# EAGLE board Qwiic_4_Pin_Fan_Controller-Panel (EAGLE 9.5.2), part 1 of 4
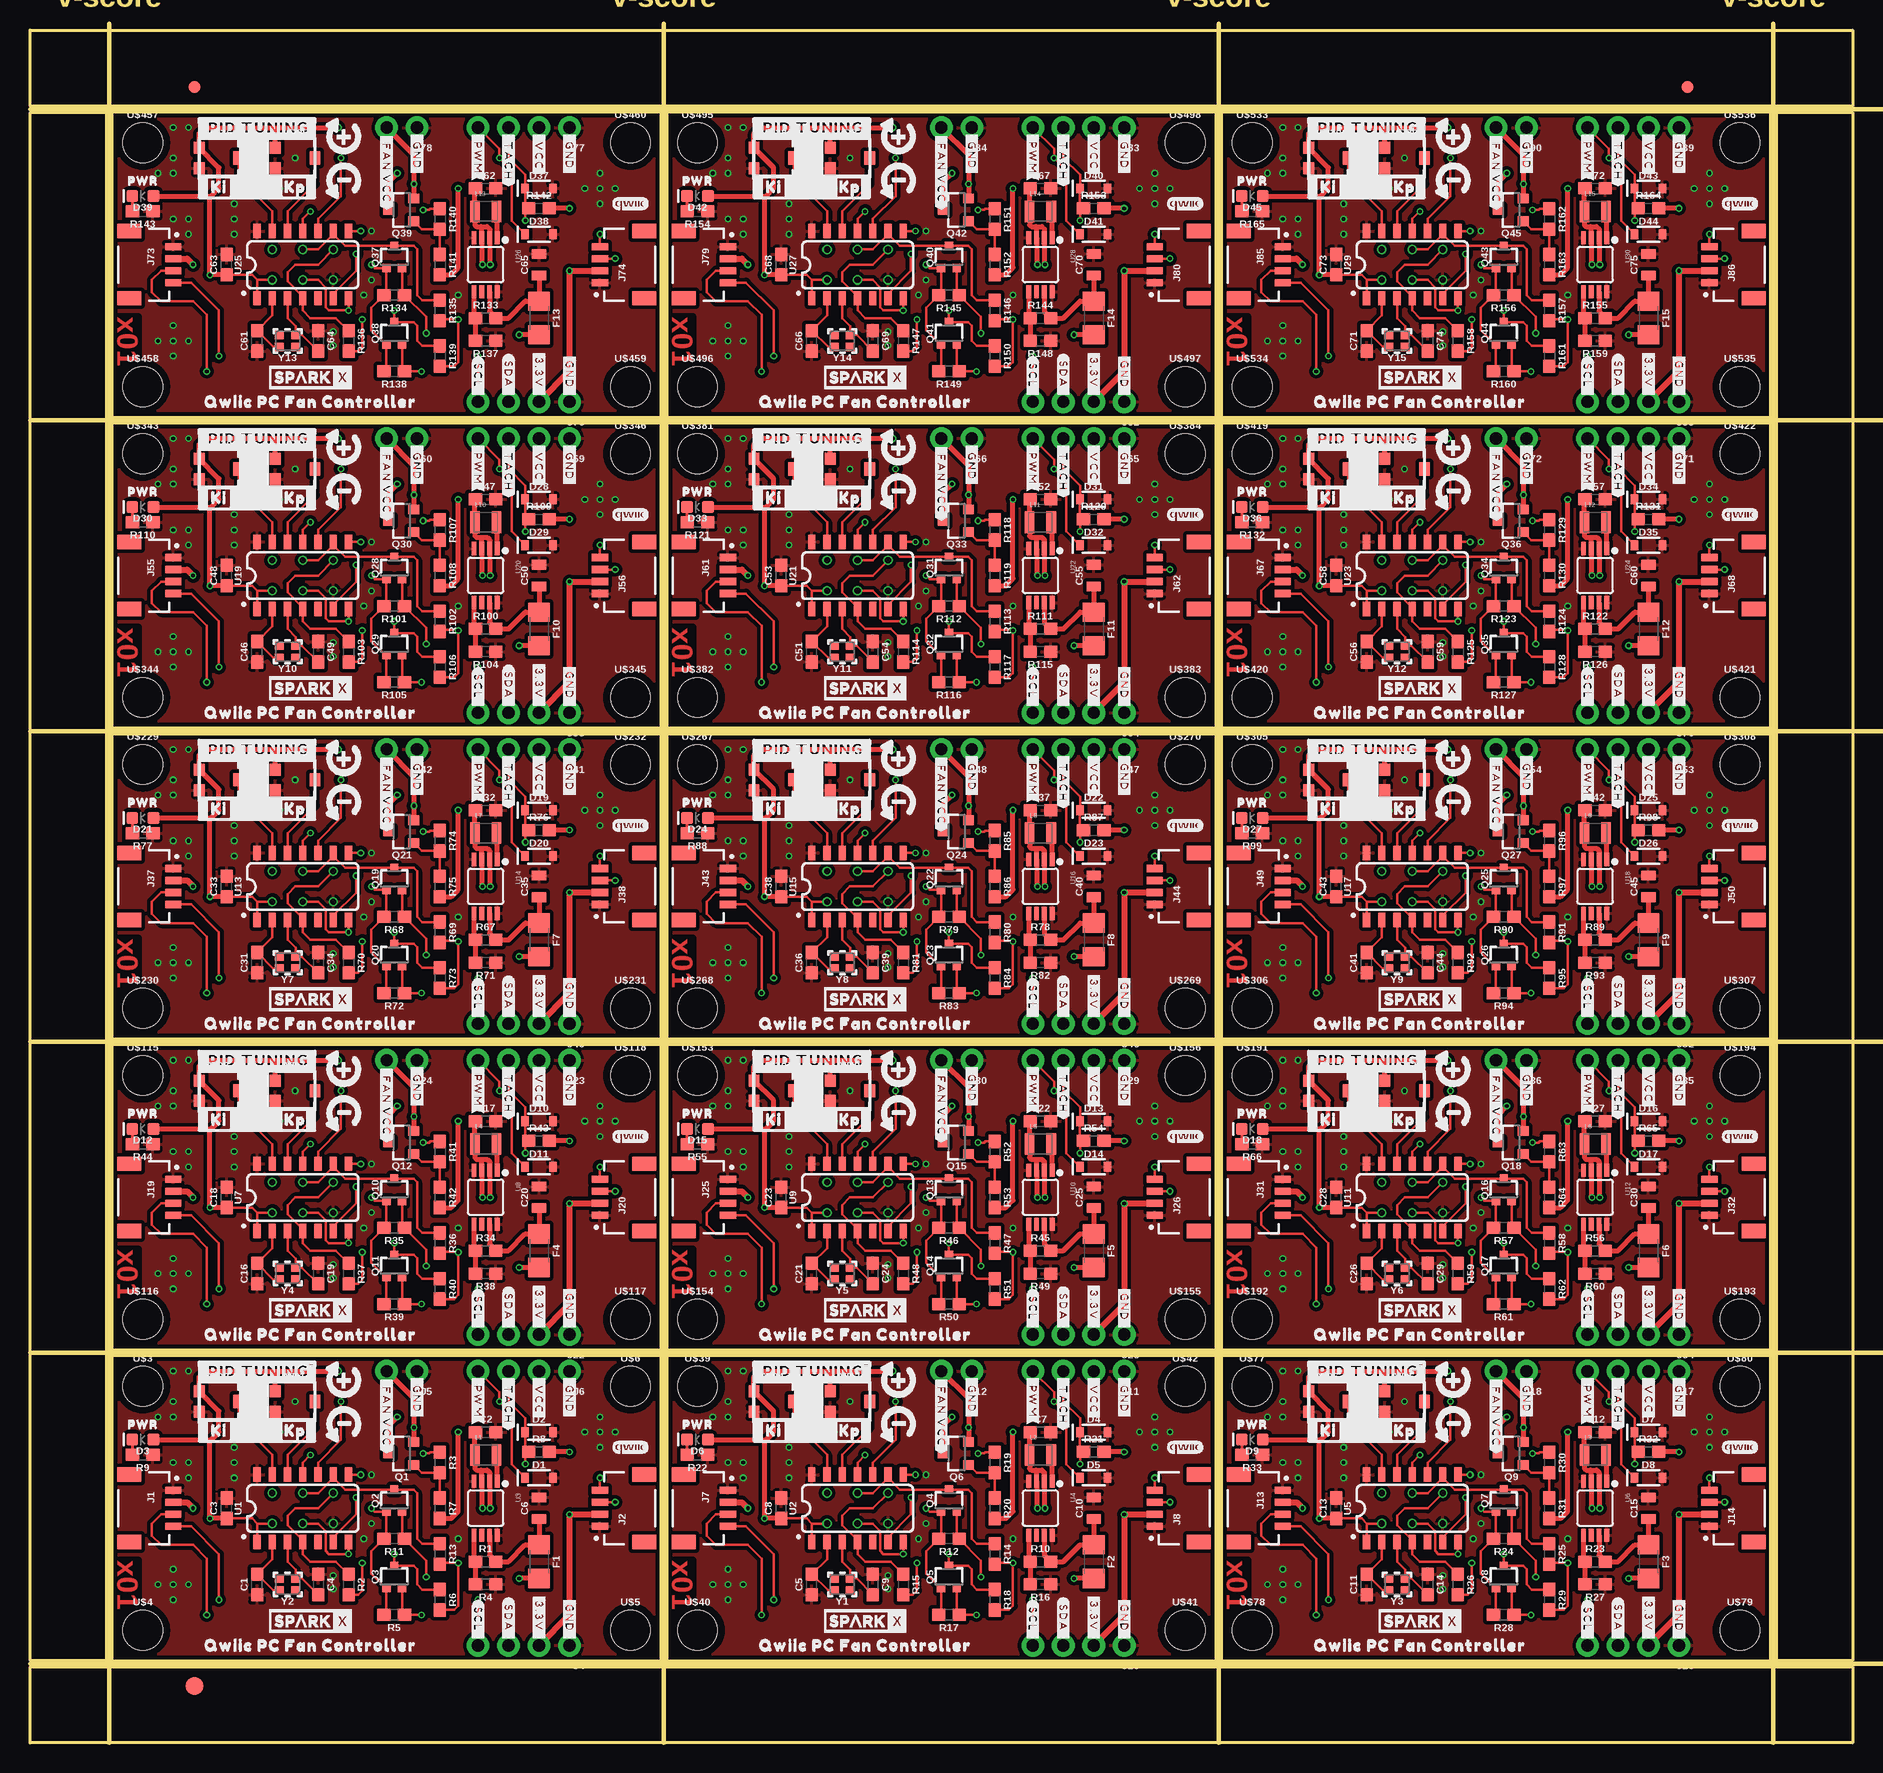
[diagram p0: board, top side]
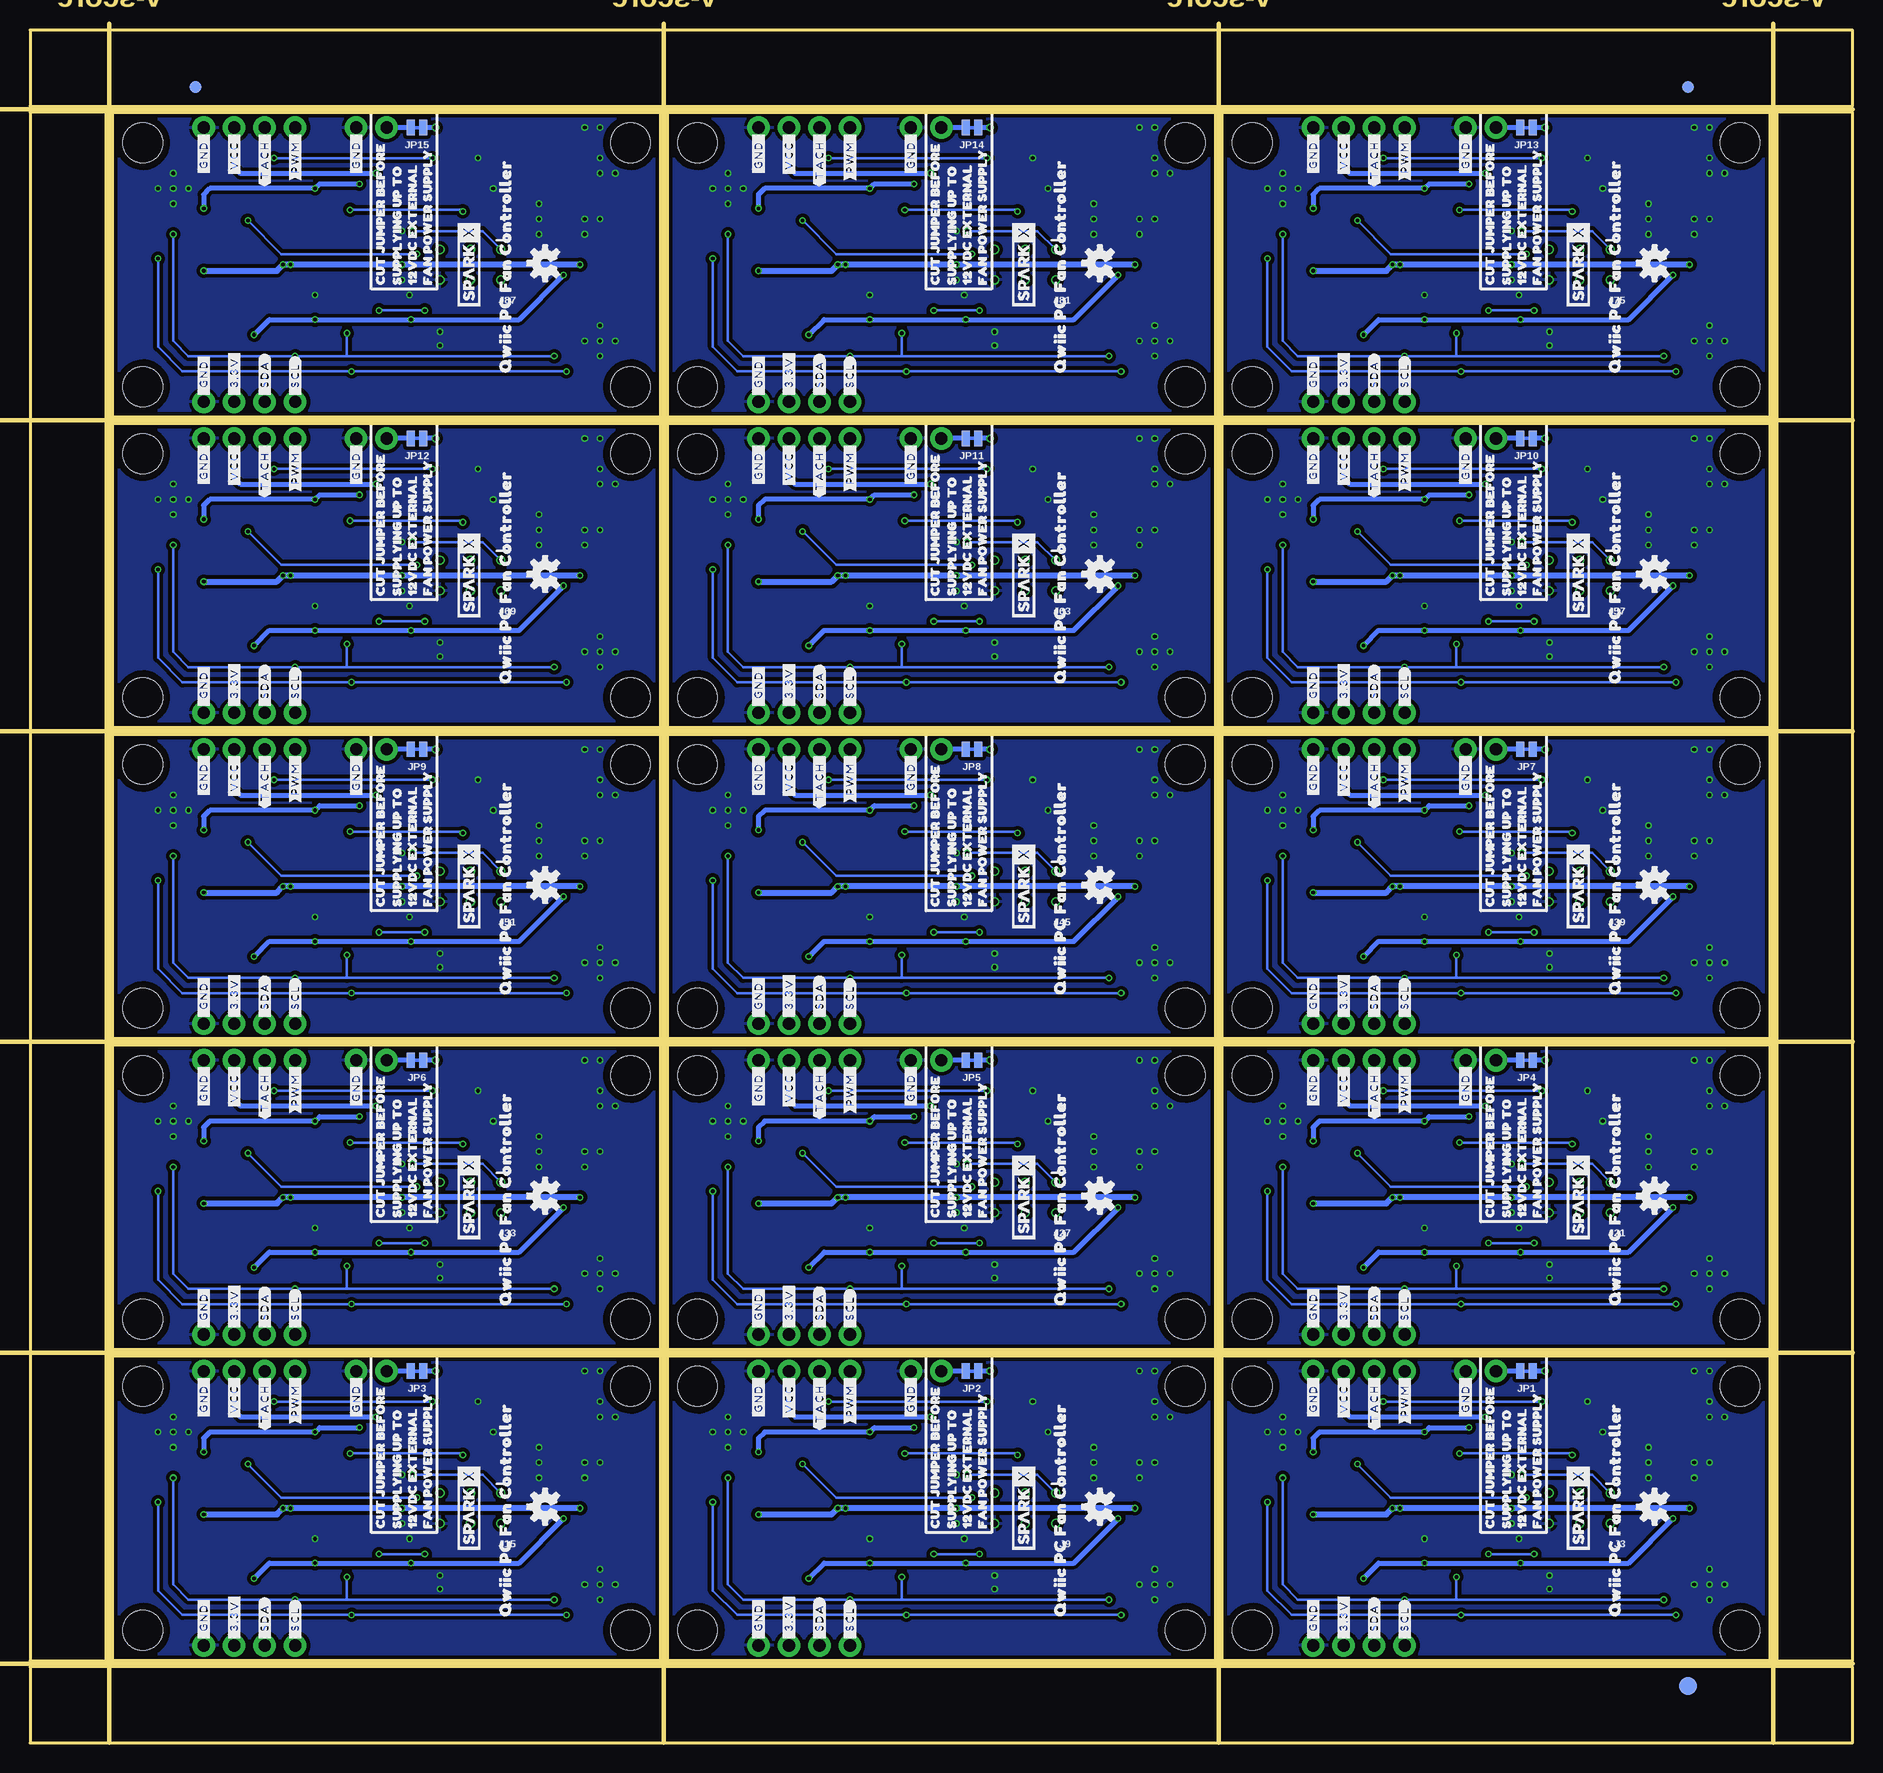
[diagram p1: board, bottom side, seen from below]

Size 151.89 x 142.75 mm. Coordinates in mm from the lower left corner, seen from the top.
Outline: 6.86,6.86 52.58,6.86 52.58,32.26 6.86,32.26 6.86,6.86
Outline: 53.09,6.86 98.81,6.86 98.81,32.26 53.09,32.26 53.09,6.86
Outline: 99.31,6.86 145.03,6.86 145.03,32.26 99.31,32.26 99.31,6.86
Outline: 6.86,32.77 52.58,32.77 52.58,58.17 6.86,58.17 6.86,32.77
Outline: 53.09,32.77 98.81,32.77 98.81,58.17 53.09,58.17 53.09,32.77
Outline: 99.31,32.77 145.03,32.77 145.03,58.17 99.31,58.17 99.31,32.77
Outline: 6.86,58.67 52.58,58.67 52.58,84.07 6.86,84.07 6.86,58.67
Outline: 53.09,58.67 98.81,58.67 98.81,84.07 53.09,84.07 53.09,58.67
Outline: 99.31,58.67 145.03,58.67 145.03,84.07 99.31,84.07 99.31,58.67
Outline: 6.86,84.58 52.58,84.58 52.58,109.98 6.86,109.98 6.86,84.58
Outline: 53.09,84.58 98.81,84.58 98.81,109.98 53.09,109.98 53.09,84.58
Outline: 99.31,84.58 145.03,84.58 145.03,109.98 99.31,109.98 99.31,84.58
Outline: 6.86,110.49 52.58,110.49 52.58,135.89 6.86,135.89 6.86,110.49
Outline: 53.09,110.49 98.81,110.49 98.81,135.89 53.09,135.89 53.09,110.49
Outline: 99.31,110.49 145.03,110.49 145.03,135.89 99.31,135.89 99.31,110.49
Outline: 0,6.35 151.89,6.35 151.89,0 0,0 0,6.35
Outline: 145.54,135.89 151.89,135.89 151.89,6.86 145.54,6.86 145.54,135.89
Outline: 0,142.75 151.89,142.75 151.89,136.4 0,136.4 0,142.75
Outline: 0,135.89 6.35,135.89 6.35,6.86 0,6.86 0,135.89
Copper layers (1*16): Top 0.035mm / dielectric 1.5mm / Bottom 0.035mm
Design rules "Qwiic_4_Pin_Fan_Controller": minimum track width 5mil, minimum drill 0.3mm, track to track 5mil, track to pad 5mil, pad to pad 5mil, via to via 5mil, smd to smd 5mil, copper to edge 7mil, drill to drill 7mil, minimum pad ring 5mil, minimum via ring 5mil, stop-mask expansion 4mil, vias tented up to drill 25mil, thermal gap 10mil
Net classes: 1 power: width 0.203 mm
Milling: 10 lines

## Footprints (pad centres in the part's own frame; a part is rotated, then mirrored left to right if it is on the bottom)
0603 = smd 1.1 x 1: 1 -0.85,0; 2 0.85,0
0805 = smd 0.8 x 1.2: 1 -0.9,0; 2 0.9,0
SOD-323 = smd 0.63 x 0.83: A 1.15,0; C -1.15,0
LED-0603 = smd 1 x 1: A -0.877,0; C 0.877,0
FIDUCIAL-1X2 = smd 1 x 1: 1 0,0
FIDUCIAL-1.5X3 = smd 1.5 x 1.5: 1 0,0
1206 = smd 1.6 x 1.8: 1 -1.4,0; 2 1.4,0
JST04_1MM_RA = smd 0.6 x 1.35: 1 -1.5,0; 2 -0.5,0; 3 0.5,0; 4 1.5,0 | smd 1.2 x 2: NC1 2.8,-3.675; NC2 -2.8,-3.675
2X3_TEST_POINTS = drill 0.508: 1 -2.54,-1.27; 2 -2.54,1.27; 3 0,-1.27; 4 0,1.27; 5 2.54,-1.27; 6 2.54,1.27
1X04_NO_SILK = drill 1.016 pad 1.88: 1 0,0; 2 2.54,0; 3 5.08,0; 4 7.62,0
1X02_NO_SILK = drill 1.016 pad 1.88: 1 0,0; 2 2.54,0
SMT-JUMPER_2_NC_TRACE_NO-SILK = smd 0.66 x 1.27: 1 -0.521,0; 2 0.521,0
0806 = smd 0.8 x 1.8: 1 -0.9,0; 2 0.9,0
SOT23-3 = smd 0.8 x 0.9: 1 -0.95,-1; 2 0.95,-1; 3 0,1.1
SOT323 = smd 0.7 x 0.7: 1 -0.65,-0.925; 2 0.65,-0.925; 3 0,0.925
SO14 = smd 0.6 x 1.2: 1 -3.81,-2.8; 2 -2.54,-2.8; 3 -1.27,-2.8; 4 0,-2.8; 5 1.27,-2.8; 6 2.54,-2.8; 7 3.81,-2.8; 8 3.81,2.8; 9 2.54,2.8; 10 1.27,2.8; 11 0,2.8; 12 -1.27,2.8; 13 -2.54,2.8; 14 -3.81,2.8
MSOP8 = smd 0.4 x 1.1: 1 -0.975,-2.25; 2 -0.325,-2.25; 3 0.325,-2.25; 4 0.975,-2.25; 5 0.975,2.25; 6 0.325,2.25; 7 -0.325,2.25; 8 -0.975,2.25
STAND-OFF = hole 3.302: 0,0
TRIMPOT-SMD-3MM-CLOSED = smd 1 x 0.9: 1 -0.85,-1.65; 3 0.85,-1.65 | smd 1.1 x 0.9: 2 0,1.65
CRYSTAL-SMD-2.0X1.6MM = smd 0.75 x 0.7: 1 -0.675,-0.5; 2 0.675,-0.5; 3 0.675,0.5; 4 -0.675,0.5